# EAGLE board BRD File (EAGLE 9.7.0)

Size 200.13 x 191.69 mm. Coordinates in mm from the lower left corner, seen from the top.
Outline: 0,0 200.13,0 200.13,191.69 0,191.69 0,0
Copper layers (1*16): Top 0.035mm / dielectric 1.5mm / Bottom 0.035mm
Design rules "default": minimum track width 6mil, minimum drill 0.35mm, track to track 6mil, track to pad 6mil, pad to pad 6mil, via to via 6mil, smd to smd 6mil, copper to edge 40mil, drill to drill 6mil, minimum pad ring 10mil, minimum via ring 8mil, stop-mask expansion 4mil, vias tented up to drill 0mil, thermal gap 10mil

## Footprints (pad centres in the part's own frame; a part is rotated, then mirrored left to right if it is on the bottom)
LEDRD254W60D565H860B = drill 0.981 pad 1.581: 1 -1.27,0; 2 1.27,0
LEDRD254W60D565H860B_Y = drill 0.981 pad 1.581: 1 -1.27,0; 2 1.27,0
RESAD1016W63L850D250B = drill 0.83 pad 1.43: 1 -5.08,0; 2 5.08,0
GL5528 = drill 0.8 pad 1.4: 1 -1.702,0; 2 1.702,0
ARDUINO-UNO-R3-SHIELD = drill 1.016 pad 1.88: 3.3V 24.13,-2.54; 5V 24.13,0; A0 24.13,12.7; A1 24.13,15.24; A2 24.13,17.78; A3 24.13,20.32; A4 24.13,22.86; A5 24.13,25.4; AREF -24.13,-13.97; D2 -24.13,20.32; D3 -24.13,17.78; D4 -24.13,15.24; D5 -24.13,12.7; D6 -24.13,10.16; D7 -24.13,7.62; D8 -24.13,3.81; D9 -24.13,1.27; D10 -24.13,-1.27; D11 -24.13,-3.81; D12 -24.13,-6.35; D13 -24.13,-8.89; GND@0 24.13,2.54; GND@1 24.13,5.08; GND@2 -24.13,-11.43; IOREF 24.13,-7.62; NC 24.13,-10.16; RES 24.13,-5.08; RX -24.13,25.4; SCL -24.13,-19.05; SDA -24.13,-16.51; TX -24.13,22.86; VIN 24.13,7.62
TO92 = drill 0.813 octagon: 1 -1.27,0; 2 0,1.905; 3 1.27,0
JHD-162A = drill 1.016 long: 1 -19.05,0; 2 -16.51,0; 3 -13.97,0; 4 -11.43,0; 5 -8.89,0; 6 -6.35,0; 7 -3.81,0; 8 -1.27,0; 9 1.27,0; 10 3.81,0; 11 6.35,0; 12 8.89,0; 13 11.43,0; 14 13.97,0; 15 16.51,0; 16 19.05,0

## Placement (x,y rotation side)
D1  RED  [LEDRD254W60D565H860B]  59.71,183.78 180 top
D2  RED  [LEDRD254W60D565H860B]  69.87,183.78 180 top
D3  RED  [LEDRD254W60D565H860B]  80.03,183.78 180 top
D4  YELLOW  [LEDRD254W60D565H860B_Y]  66.38,7.91 0 top
R1  220  [RESAD1016W63L850D250B]  58.44,171.08 90 top
R2  220  [RESAD1016W63L850D250B]  68.6,171.08 90 top
R3  220  [RESAD1016W63L850D250B]  78.76,171.08 90 top
R4  PHOTOCELL_GL5528  [GL5528]  79.08,7.91 180 top
R5  200  [RESAD1016W63L850D250B]  80.35,12.99 90 top
R6  1k  [RESAD1016W63L850D250B]  163.55,113.69 90 top
U1  ARDUINO-UNO-R3-SHIELD  [ARDUINO-UNO-R3-SHIELD]  47.88,95.42 270 top
U2  TMP36GT9Z_TO92  [TO92]  20.34,183.78 0 top
U3  LCD-16X2JHD-162A  [JHD-162A]  144.5,103.65 0 top

## Library data of the parts
D1-D3 = Tinkercad; CATEGORY: Opto-Electronic; SUB-CATEGORY: LED; VALUE: LED_RED
D4 = Tinkercad; CATEGORY: Opto-Electronic; SUB-CATEGORY: LED; VALUE: LED_YELLOW
R1-R6 U1-U3 = Tinkercad

## Nets
D1_C: D1.2 R1.2
D2_C: D2.2 R2.2
D3_C: D3.2 R3.2
U1_5V: R4.2 U1.5V U2.3 U3.2 U3.15
U1_A0: U1.A0 U2.2
U1_A1: R4.1 R5.1 R5.2 U1.A1
U1_D2: D3.1 U1.D2
U1_D3: D2.1 U1.D3
U1_D4: D1.1 U1.D4
U1_D5: U1.D5 U3.14
U1_D6: U1.D6 U3.13
U1_D7: U1.D7 U3.12
U1_D8: U1.D8 U3.11
U1_D10: U1.D10 U3.6
U1_D11: D4.1 U1.D11
U1_D12: U1.D12 U3.4
U1_GND: D4.2 R1.1 R2.1 R3.1 R6.2 U1.GND@0 U1.GND@1 U1.GND@2 U2.1 U3.1 U3.3 U3.5
U3_LED-: R6.1 U3.16

## Tracks (layer width: path | path; a pad name or v marks a point on that pad's centre or on a via)
D1_C  (1 unrouted)
D2_C  (1 unrouted)
D3_C  (1 unrouted)
U1_5V  (4 unrouted)
U1_A0  (1 unrouted)
U1_A1  (3 unrouted)
U1_D2  (1 unrouted)
U1_D3  (1 unrouted)
U1_D4  (1 unrouted)
U1_D5  (1 unrouted)
U1_D6  (1 unrouted)
U1_D7  (1 unrouted)
U1_D8  (1 unrouted)
U1_D10  (1 unrouted)
U1_D11  (1 unrouted)
U1_D12  (1 unrouted)
U1_GND  (11 unrouted)
U3_LED-  (1 unrouted)